# EAGLE board steve (EAGLE 8.4.3)

Size 160 x 100 mm. Coordinates in mm from the lower left corner, seen from the top.
Outline: 0,0 160,0 160,100 0,100 0,0
Copper layers (1*16): Top 0.035mm / dielectric 1.5mm / Bottom 0.035mm
Design rules "default": minimum track width 6mil, minimum drill 0.35mm, track to track 6mil, track to pad 6mil, pad to pad 6mil, via to via 6mil, smd to smd 6mil, copper to edge 40mil, drill to drill 6mil, minimum pad ring 10mil, minimum via ring 8mil, stop-mask expansion 4mil, vias tented up to drill 0mil, thermal gap 10mil

## Footprints (pad centres in the part's own frame; a part is rotated, then mirrored left to right if it is on the bottom)
C0805K = smd 1.3 x 1.6: 1 -1,0; 2 1,0
C1206 = smd 1.6 x 1.8: 1 -1.4,0; 2 1.4,0
3568 = drill 1.6 long: P$1 -4.96,1.7; P$2 4.96,1.7; P$3 4.96,-1.7; P$4 -4.96,-1.7
1X04 = drill 1.016 long: 1 -3.81,0; 2 -1.27,0; 3 1.27,0; 4 3.81,0
2X03 = drill 1.016 octagon: 1 -2.54,-1.27; 2 -2.54,1.27; 3 0,-1.27; 4 0,1.27; 5 2.54,-1.27; 6 2.54,1.27
MSS7348 = smd 1.6 x 2.2: P$1 -3,0; P$2 3,0
SML0805 = smd 1.2 x 1.2: A 1.05,0; C -1.05,0
CTS406 = smd 1.9 x 1.4: 1 -2.2,-1.2; 2 2.2,-1.2; 3 2.2,1.2; 4 -2.2,1.2
R0805 = smd 1.3 x 1.5: 1 -0.95,0; 2 0.95,0
QFP80P900X900X120-32N = smd 1.473 x 0.508: 1 -4.115,2.794; 2 -4.115,2.007; 3 -4.115,1.194; 4 -4.115,0.406; 5 -4.115,-0.406; 6 -4.115,-1.194; 7 -4.115,-2.007; 8 -4.115,-2.794; 17 4.115,-2.794; 18 4.115,-2.007; 19 4.115,-1.194; 20 4.115,-0.406; 21 4.115,0.406; 22 4.115,1.194; 23 4.115,2.007; 24 4.115,2.794 | smd 0.508 x 1.473: 9 -2.794,-4.115; 10 -2.007,-4.115; 11 -1.194,-4.115; 12 -0.406,-4.115; 13 0.406,-4.115; 14 1.194,-4.115; 15 2.007,-4.115; 16 2.794,-4.115; 25 2.794,4.115; 26 2.007,4.115; 27 1.194,4.115; 28 0.406,4.115; 29 -0.406,4.115; 30 -1.194,4.115; 31 -2.007,4.115; 32 -2.794,4.115
DPAK = smd 3 x 1.6: 1 0,-2.3; 2 0,2.3 | smd 6.2 x 5.8: 3 -7.18,0

## Placement (x,y rotation side)
C4  22p  [C0805K]  27.69,73.28 90 top
C5  22p  [C0805K]  30.48,73.28 270 top
C6  0.1u  [C0805K]  25.15,73.28 270 top
C7  0.22u  [C0805K]  22.73,73.28 270 top
C8  220u  [C1206]  20.32,72.39 270 top
FUSE1  MINI297-3568  [3568]  36.83,41.91 0 top
HC06  [1X04]  93.98,73.66 0 top
JP2  [2X03]  49.53,41.91 90 top
L2  20uH  [MSS7348]  41.91,49.53 0 top
LIVE  LIVE  [SML0805]  77.47,73.66 0 top
POWER  PWR  [SML0805]  82.55,73.66 0 top
Q3  16MHz  [CTS406]  24.38,47.24 90 top
R2  10k  [R0805]  19.05,63.5 270 top
R3  330  [R0805]  29.21,67.31 270 top
R4  330  [R0805]  24.13,66.04 270 top
U5  [QFP80P900X900X120-32N]  31.75,52.07 0 top
U6  MC7805BDD  [DPAK]  81.28,57.15 0 top

## Library data of the parts
C4 C5 = resistor
C6 C7 R2-R4 = rcl
C8 = Capacitors
FUSE1 = Fuse
HC06 = Headers_IFE
JP2 = pinhead
L2 = Inductors
LIVE POWER = led
Q3 = adafruit; OC_FARNELL: unknown; OC_NEWARK: unknown
U5 = Atmel_By_element14_Batch_1-00; MPN: ATMEGA328P-AU; OC_FARNELL: 1715486; OC_NEWARK: 14R4631; PACKAGE: TQFP-32; SUPPLIER: Atmel
U6 = IC's

## Nets
+5V: C6.1 HC06.1 JP2.2 LIVE.A POWER.A R2.2 U5.4 U5.6 U5.18 U6.2
+12V: C7.1 C8.1 L2.P$2 U6.1
GND: C4.1 C5.2 C6.2 C7.2 C8.2 HC06.2 JP2.6 R3.1 U5.3 U5.5 U5.21 U6.3
LIVE: R4.1 U5.11
MISO: JP2.1 U5.16
MOSI: JP2.4 U5.15
N$16: POWER.C R3.2
N$17: LIVE.C R4.2
PWR_IN: FUSE1.P$1 FUSE1.P$2 FUSE1.P$3 FUSE1.P$4 L2.P$1
RESET: JP2.5 R2.1 U5.29
RX: HC06.4 U5.31
SCK: JP2.3 U5.17
TX: HC06.3 U5.30
XTAL1: C4.2 Q3.3 U5.7
XTAL2: C5.1 Q3.1 U5.8

## Tracks (layer width: path | path; a pad name or v marks a point on that pad's centre or on a via)
+5V  (9 unrouted)
+12V  (3 unrouted)
GND  (11 unrouted)
LIVE  (1 unrouted)
MISO  (1 unrouted)
MOSI  (1 unrouted)
N$16  (1 unrouted)
N$17  (1 unrouted)
PWR_IN  (4 unrouted)
RESET  (2 unrouted)
RX  (1 unrouted)
SCK  (1 unrouted)
TX  (1 unrouted)
XTAL1  (2 unrouted)
XTAL2  (2 unrouted)